# EAGLE board Capacitor (EAGLE 9.6.2)
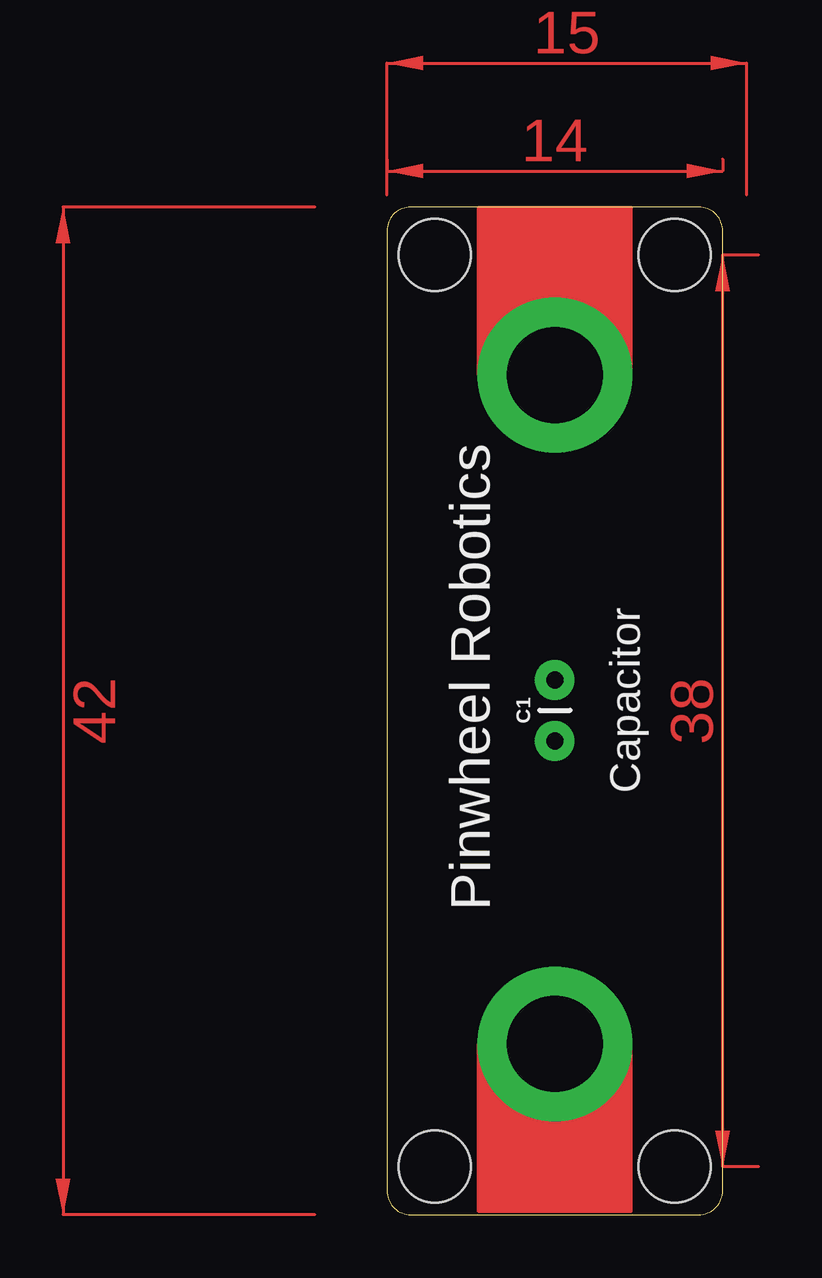
[diagram p0: board, top side]
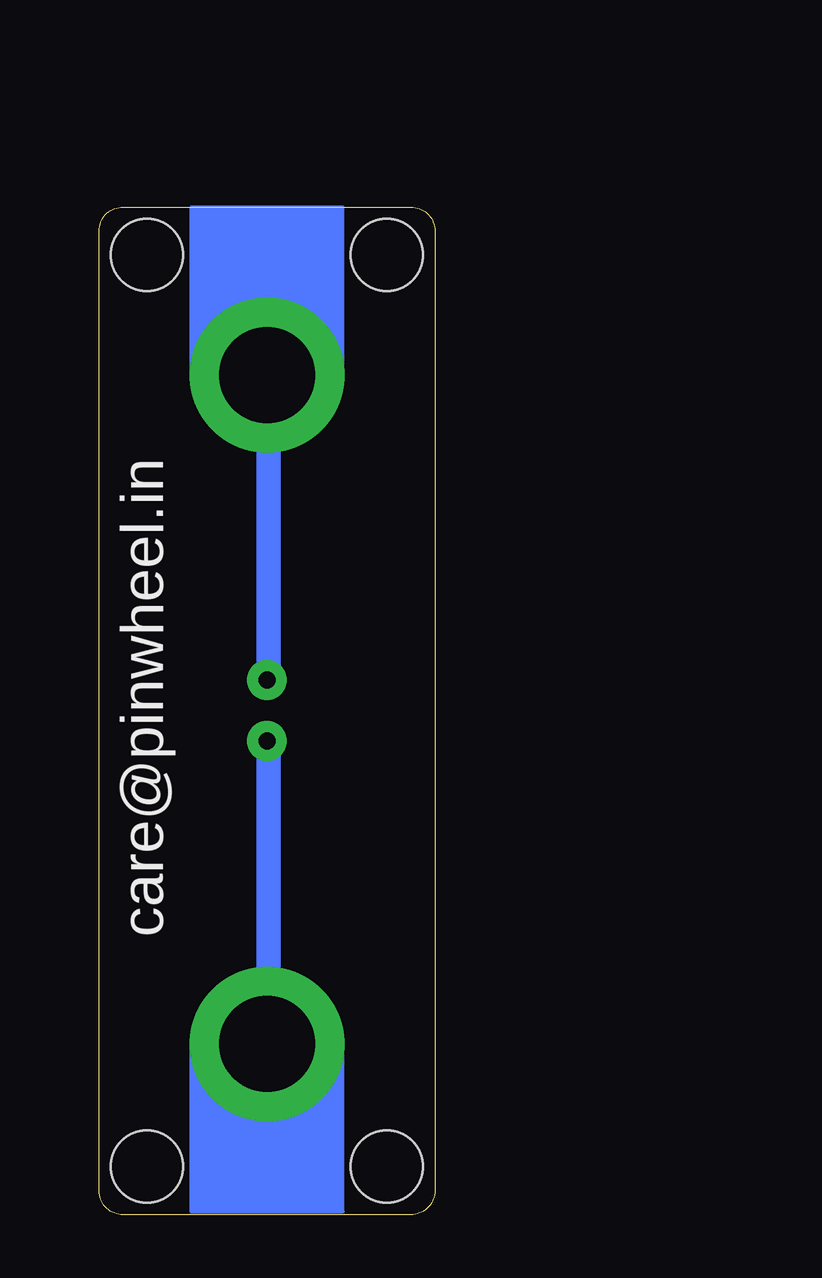
[diagram p1: board, bottom side, seen from below]

Size 14 x 42 mm. Coordinates in mm from the lower left corner, seen from the top.
Outline: 0,41 0,1 arc90 1,0 13,0 arc90 14,1 14,41 arc90 13,42 1,42 arc90 0,41
Copper layers (1*16): Top 0.035mm / dielectric 1.5mm / Bottom 0.035mm
Design rules "default *": minimum track width 20mil, minimum drill 0.35mm, track to track 6mil, track to pad 6mil, pad to pad 6mil, via to via 6mil, smd to smd 6mil, copper to edge 40mil, drill to drill 6mil, minimum pad ring 10mil, minimum via ring 8mil, stop-mask expansion 4mil, vias tented up to drill 0mil, thermal gap 10mil
Holes 3 mm at 2,40 12,40 2,2 12,2

## Footprints (pad centres in the part's own frame; a part is rotated, then mirrored left to right if it is on the bottom)
CAP-PTH-2.54 = drill 0.7 pad 1.651: 1 -1.27,0; 2 1.27,0
MICROBIT_PAD = drill 4 pad 6.452: PAD 0,0

## Placement (x,y rotation side)
C1  22pF  [CAP-PTH-2.54]  7,21.02 90 top
U$1  MICROBIT_PAD  [MICROBIT_PAD]  7,35 180 top
U$2  MICROBIT_PAD  [MICROBIT_PAD]  7,7.11 0 top

## Library data of the parts
C1 = SparkFun-Capacitors; PROD_ID: CAP-09128
U$1 U$2 = microbit

## Nets
N$1: C1.1 U$2.PAD
N$2: C1.2 U$1.PAD

## Tracks (layer width: path | path; a pad name or v marks a point on that pad's centre or on a via)
N$1
  Bottom 0.508: 6.93,19.48 C1.1 | 6.93,7.26 U$2.PAD
  Bottom 1.016: 6.93,7.26 6.93,19.48
N$2
  Bottom 0.508: 6.93,22.45 C1.2 | 6.93,34.67 U$1.PAD
  Bottom 1.016: 6.93,34.67 6.93,22.45
(copper drawn outside any net)
  shapes: Top area x4

## Text on the board
tPlace: Capacitor | Pinwheel Robotics
bPlace: care@pinwheel.in